# Altium PCB HEPA_CONTROL_PCB.PcbDoc (part 2 of 2)
Units mm, origin at the board's own origin, x right, y up, seen from the top; angles counter-clockwise.
Board outline 243.32 x 101.42 mm, 2 copper layers (Top Layer, Bottom Layer); 86 components, 74 nets, 296 pads, 39 vias.
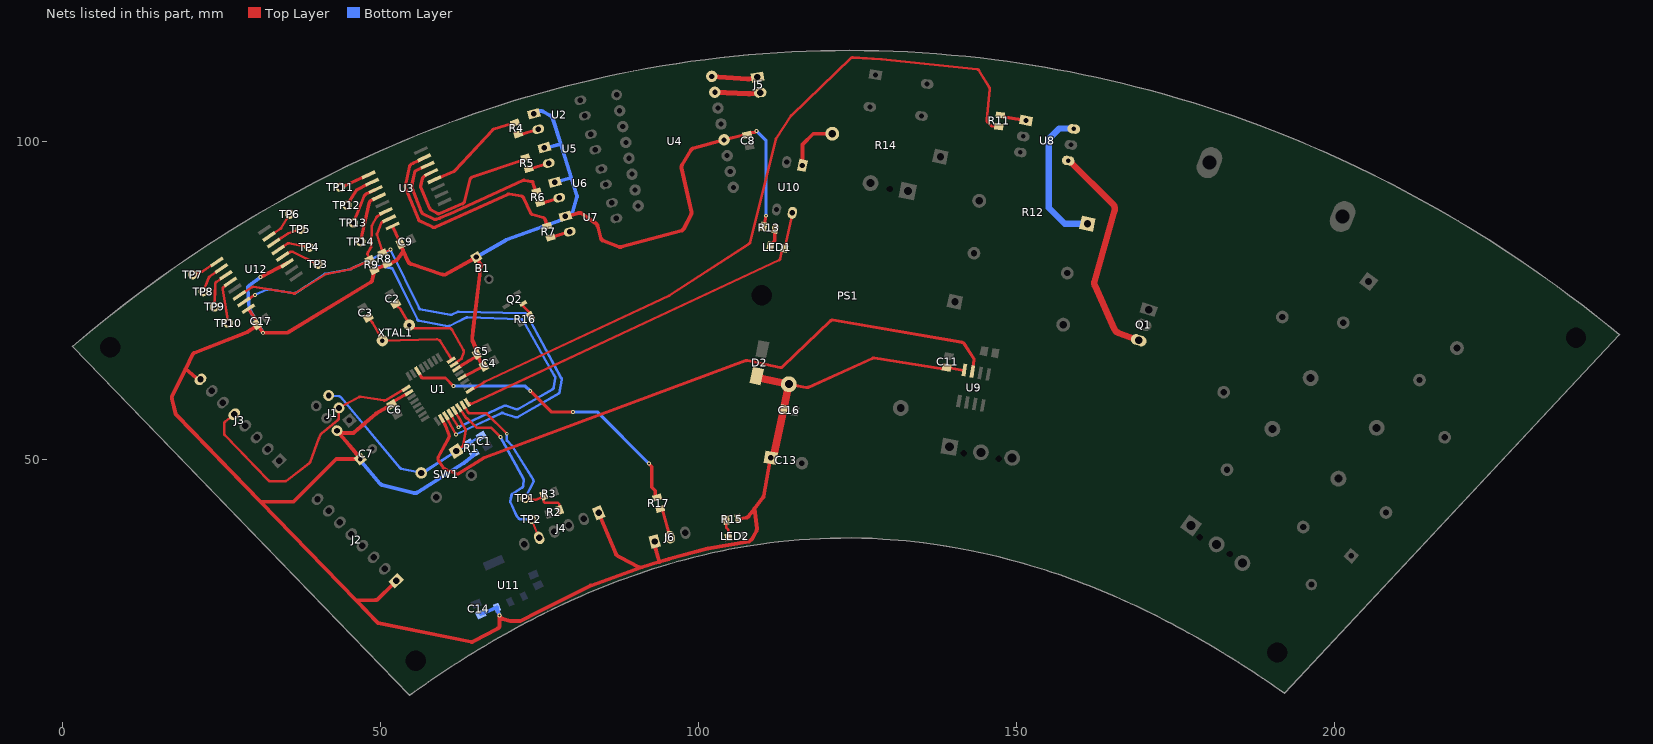
[diagram p2: the nets of this part, all layers, seen from the top]

## Via types
v1: diameter 0.6, hole 0.3, Top Layer to Bottom Layer, tented both sides, 39 vias

## Nets (pads, with @x,y where several pads share a name; then routed paths per layer and width w, separated by ;. In a path a pad name is that pad's centre, name@x,y a point inside that pad or via, vN(x,y) a via of type N, cw(c..) or ccw(c..) an arc to the next point about the centre after c; other vN are vias at no path point) (continued)
NetJ4_5: J4.5 TP2.1 U1.30 | length 31.1
  Top Layer w0.4: U1.30@62.282,58.06 62.63,57.646 63.399,56.527 ccw(c63.728,56.754) 63.658,56.36 ; 63.659,56.36 65.086,54.933 67.368,54.933 v1(68.834,53.467) ; TP2.1@73.726,40.503 74.832,37.822 J4.5@74.93,37.592
  Bottom Layer w0.4: v1(68.834,53.467) 72.503,46.838 72.408,45.788 72.408,45.786 cw(c72.009,45.824) 72.225,45.487 70.76,44.545 ccw(c70.976,44.209) 70.582,44.276 70.42,43.337 70.414,43.303 70.414,43.182 71.417,40.978 71.468,40.927 ; TP2.1@73.726,40.503 72.046,40.512 ; J4.5@74.893,37.68 J4.5@74.93,37.592 ; 71.468,40.927 71.765,40.63 ; 71.468,40.927 71.765,40.63 ; 71.468,40.927 71.765,40.63 ; 71.468,40.927 71.765,40.63 ; 71.765,40.63 ccw(c72.049,40.912) 72.045,40.512 ; 71.765,40.63 ccw(c72.049,40.912) 72.045,40.512 ; 71.765,40.63 ccw(c72.049,40.912) 72.045,40.512 ; 71.765,40.63 ccw(c72.049,40.912) 72.045,40.512
NetJ5_1: J5.1 U4.16 | length 9.4
  Top Layer w0.8: U4.16@102.074,110.176 107.698,109.738 ; J5.1@109.257,110.07 J5.1@108.68,109.885 ; 107.698,109.738 107.699,109.738 ; 107.698,109.738 107.699,109.738 ; 107.698,109.738 107.699,109.738 ; 107.699,109.738 ccw(c107.76,110.535) 107.899,109.748 ; 107.699,109.738 ccw(c107.76,110.535) 107.899,109.748 ; 107.699,109.738 ccw(c107.76,110.535) 107.899,109.748 ; 107.699,109.738 ccw(c107.76,110.535) 107.899,109.748 ; 107.899,109.748 J5.1@108.68,109.885 ; 107.899,109.748 J5.1@108.68,109.885 ; 107.899,109.748 J5.1@108.68,109.885
NetJ5_2: J5.2 U4.15 | length 7.4
  Top Layer w0.8: U4.15@102.559,107.683 107.894,107.444 ; J5.2@109.691,107.608 109.449,107.565 107.995,107.446 ; 107.894,107.444 107.896,107.444 ; 107.894,107.444 107.896,107.444 ; 107.894,107.444 107.896,107.444 ; 107.896,107.444 ccw(c107.93,108.244) 107.995,107.446 ; 107.896,107.444 ccw(c107.93,108.244) 107.995,107.446 ; 107.896,107.444 ccw(c107.93,108.244) 107.995,107.446 ; 107.896,107.444 ccw(c107.93,108.244) 107.995,107.446
NetJ6_2: J6.2 R17.2 | length 4.8
  Top Layer w0.5: R17.2@93.968,42.15 94.358,41.996 J6.2@95.504,37.719
NetLED1_1: LED1.1 R13.1 | length 2.9
  Top Layer w0.6: LED1.1@111.319,83.541 111.319,83.651 111.996,84.328 111.996,86.122 R13.1@112.04,86.166
NetLED1_2: LED1.2 U1.32 U10.4 | length 61.9
  Top Layer w0.4: U1.32@63.639,58.907 64.116,58.734 64.182,58.71 64.341,58.71 112.706,81.298 112.839,81.432 112.864,81.548 113.114,82.725 LED1.2@113.471,83.083 113.637,83.482 114.698,88.475 U10.4@114.75,88.719
NetLED2_1: LED2.1 R15.1 | length 2.8
  Top Layer w0.4: R15.1@104.357,40.383 104.357,39.207 104.702,38.862 LED2.1@104.702,37.693
NetQ1_3: Q1.3 U8.4 | length 68.1
  Top Layer w1: U8.4@158.124,96.913 158.327,96.913 165.186,90.054 ; Q1.3@169.225,68.675 168.844,68.799 166.003,69.835 ; 162.278,77.946 ccw(c163.241,77.675) 162.33,77.262 ; 162.278,77.946 ccw(c163.241,77.675) 162.33,77.262 ; 162.278,77.946 ccw(c163.241,77.675) 162.33,77.262 ; 162.278,77.946 ccw(c163.241,77.675) 162.33,77.262 ; 162.278,77.946 ccw(c163.241,77.675) 162.33,77.262 ; 162.278,77.946 ccw(c163.241,77.675) 162.33,77.262 ; 162.278,77.946 ccw(c163.241,77.675) 162.33,77.262 ; 162.278,77.946 ccw(c163.241,77.675) 162.33,77.262 ; 162.278,77.946 162.279,77.948 ; 162.278,77.946 162.279,77.948 ; 162.278,77.946 162.279,77.948 ; 162.279,77.948 165.441,89.073 ; 162.33,77.262 165.434,70.364 ; 162.33,77.262 165.434,70.364 ; 162.33,77.262 165.434,70.364 ; 165.186,90.054 cw(c164.479,89.347) 165.441,89.073 ; 165.186,90.054 cw(c164.479,89.347) 165.441,89.073 ; 165.186,90.054 cw(c164.479,89.347) 165.441,89.073 ; 165.186,90.054 cw(c164.479,89.347) 165.441,89.073 ; 165.186,90.054 cw(c164.479,89.347) 165.441,89.073 ; 165.186,90.054 cw(c164.479,89.347) 165.441,89.073 ; 165.186,90.054 cw(c164.479,89.347) 165.441,89.073 ; 165.186,90.054 cw(c164.479,89.347) 165.441,89.073 ; 165.434,70.363 ccw(c166.346,70.774) 166.003,69.835 ; 165.434,70.363 ccw(c166.346,70.774) 166.003,69.835 ; 165.434,70.363 ccw(c166.346,70.774) 166.003,69.835 ; 165.434,70.363 ccw(c166.346,70.774) 166.003,69.835 ; 165.434,70.363 ccw(c166.346,70.774) 166.003,69.835 ; 165.434,70.363 ccw(c166.346,70.774) 166.003,69.835 ; 165.434,70.363 ccw(c166.346,70.774) 166.003,69.835 ; 165.434,70.363 ccw(c166.346,70.774) 166.003,69.835
NetQ2_1: Q2.1 R16.1 | length 2.5
  Top Layer w0.4: Q2.1@72.419,74.476 72.419,74.034 73.581,72.873 R16.1@73.581,72.477
NetR2_1: R2.1 R3.2 TP1.1 U1.31 | length 31.9
  Top Layer w0.4: U1.31@62.961,58.483 63.298,58.063 63.741,57.354 ccw(c64.08,57.566) 64.11,57.167 66.658,57.167 v1(69.85,53.975) ; 74.391,43.596 75.422,43.971 R3.2@75.641,44.247 75.641,43.307 75.844,43.104 77.876,43.104 78.089,42.892 78.089,42.163 R2.1@78.16,41.965 ; TP1.1@72.71,43.805 74.195,43.576 ; TP1.1@72.71,43.805 74.195,43.576 ; TP1.1@72.71,43.805 74.195,43.576 ; 74.195,43.576 ccw(c74.254,43.972) 74.39,43.596 ; 74.195,43.576 ccw(c74.254,43.972) 74.39,43.596 ; 74.195,43.576 ccw(c74.254,43.972) 74.39,43.596 ; 74.195,43.576 ccw(c74.254,43.972) 74.39,43.596
  Bottom Layer w0.4: v1(69.85,53.975) 69.85,52.904 70.668,52.086 74.022,46.702 74.059,46.517 TP1.1@72.71,43.805
NetR4_1: R4.1 U2.2 | length 3.3
  Top Layer w0.5: R4.1@71.647,101.087 72.136,101.061 74.552,101.8 U2.2@74.793,101.869
NetR5_1: R5.1 U5.2 | length 3.3
  Top Layer w0.5: R5.1@73.298,95.626 73.752,95.717 76.203,96.466 U5.2@76.444,96.535
NetR6_1: R6.1 U6.2 | length 3.1
  Top Layer w0.5: R6.1@75.076,90.292 75.554,90.302 77.854,91.005 U6.2@78.095,91.074
NetR7_1: R7.1 U7.2 | length 3.2
  Top Layer w0.5: R7.1@76.727,84.831 77.17,84.957 79.505,85.671 U7.2@79.746,85.74
NetR11_1: R11.1 U1.1 | length 119.5
  Top Layer w0.4: U1.1@64.075,60.795 64.564,61.023 66.269,62.088 ; 66.311,62.111 95.351,75.68 ccw(c95.182,76.043) 95.4,75.707 107.945,83.861 ccw(c107.727,84.196) 108.115,84.1 112.125,100.264 cw(c112.513,100.168) 112.178,100.387 114.529,103.975 cw(c114.864,103.756) 114.587,104.044 123.954,113.037 cw(c124.231,112.748) 124.251,113.148 ; 124.252,113.148 128.767,112.904 ; R11.1@147.193,102.235 146.683,102.273 146.183,102.343 ; 66.269,62.088 cw(c66.481,61.749) 66.31,62.111 ; 66.269,62.088 cw(c66.481,61.749) 66.31,62.111 ; 66.269,62.088 cw(c66.481,61.749) 66.31,62.111 ; 66.269,62.088 cw(c66.481,61.749) 66.31,62.111 ; 128.767,112.904 cw(c128.746,112.504) 128.788,112.902 ; 128.767,112.904 cw(c128.746,112.504) 128.788,112.902 ; 128.767,112.904 cw(c128.746,112.504) 128.788,112.902 ; 128.767,112.904 cw(c128.746,112.504) 128.788,112.902 ; 128.789,112.902 143.822,111.273 ; 143.822,111.273 cw(c143.779,110.876) 144.12,111.085 ; 143.822,111.273 cw(c143.779,110.876) 144.12,111.085 ; 143.822,111.273 cw(c143.779,110.876) 144.12,111.085 ; 143.822,111.273 cw(c143.779,110.876) 144.12,111.085 ; 144.12,111.085 144.121,111.084 ; 144.12,111.085 144.121,111.084 ; 144.12,111.085 144.121,111.084 ; 144.121,111.084 145.727,108.445 cw(c145.385,108.237) 145.783,108.198 145.307,103.311 ccw(c145.705,103.273) 145.421,102.991 ; 145.422,102.99 145.954,102.458 ; 145.421,102.991 145.954,102.458 ; 145.421,102.991 145.954,102.458 ; 145.421,102.991 145.954,102.458 ; 145.954,102.458 ccw(c146.238,102.739) 146.182,102.343 ; 145.954,102.458 ccw(c146.238,102.739) 146.182,102.343 ; 145.954,102.458 ccw(c146.238,102.739) 146.182,102.343 ; 145.954,102.458 ccw(c146.238,102.739) 146.182,102.343
NetR11_2: R11.2 U8.1 | length 4.2
  Top Layer w0.6: R11.2@147.453,104.087 147.831,103.832 150.815,103.374 U8.1@151.502,103.239
NetR12_1: R12.1 U8.6 | length 22.6
  Bottom Layer w1: U8.6@159.006,101.916 158.941,101.981 156.718,101.981 155.067,100.33 155.067,89.535 157.607,86.995 R12.1@161.163,86.995
NetR14_2: R14.2 U10.1 | length 8.7
  Top Layer w0.6: U10.1@116.334,96.173 116.334,99.443 118.045,101.154 R14.2@121.028,101.154
NetR17_1: R17.1 U1.14 | length 48.4
  Top Layer w0.5: U1.14@55.828,63.86 56.075,63.443 56.515,62.738 60.198,62.738 v1(61.468,61.468) ; v1(73.533,60.706) 76.835,57.404 v1(80.264,57.404) ; v1(92.202,49.276) 92.202,49.249 92.642,48.809 92.642,45.534 93.176,45 93.176,44.264 R17.1@93.484,43.956
  Bottom Layer w0.5: v1(61.468,61.468) 72.771,61.468 v1(73.533,60.706) ; v1(80.264,57.404) 84.074,57.404 v1(92.202,49.276)
NetTP3_1: TP3.1 U12.4 | length 8.3
  Top Layer w0.4: U12.4@34.58,81.844 U12.4@35.401,82.313 ; TP3.1@40.132,80.645 36.148,82.577 ; U12.4@35.401,82.313 35.75,82.548 ; U12.4@35.401,82.313 35.75,82.548 ; U12.4@35.401,82.313 35.75,82.548 ; 35.75,82.548 cw(c35.974,82.217) 36.148,82.577 ; 35.75,82.548 cw(c35.974,82.217) 36.148,82.577 ; 35.75,82.548 cw(c35.974,82.217) 36.148,82.577 ; 35.75,82.548 cw(c35.974,82.217) 36.148,82.577
NetTP4_1: TP4.1 U12.5 | length 5.2
  Top Layer w0.4: U12.5@33.869,82.897 34.653,83.421 35.296,83.855 cw(c35.52,83.523) 35.595,83.916 TP4.1@38.735,83.312
NetTP5_1: TP5.1 U12.6 | length 4.7
  Top Layer w0.4: U12.6@33.159,83.949 33.947,84.468 35.388,85.44 cw(c35.611,85.109) 35.485,85.488 TP5.1@37.338,86.106
NetTP6_1: TP6.1 U12.7 | length 13.2
  Top Layer w0.4: U12.7@32.449,85.002 33.236,85.522 34.218,86.184 ; 34.218,86.184 ccw(c33.994,86.516) 34.336,86.308 ; 34.218,86.184 ccw(c33.994,86.516) 34.336,86.308 ; 34.218,86.184 ccw(c33.994,86.516) 34.336,86.308 ; 34.218,86.184 ccw(c33.994,86.516) 34.336,86.308 ; 34.336,86.308 TP6.1@35.687,88.519 ; 34.336,86.308 TP6.1@35.687,88.519 ; 34.336,86.308 TP6.1@35.687,88.519 ; 34.336,86.308 TP6.1@35.687,88.519
NetTP7_1: TP7.1 U12.9 | length 4.3
  Top Layer w0.4: TP7.1@20.447,78.994 21.918,79.484 ccw(c21.793,79.864) 22.016,79.533 23.444,80.496 U12.9@24.242,80.999
NetTP8_1: TP8.1 U12.10 | length 4.8
  Top Layer w0.4: TP8.1@22.098,76.327 22.942,78.497 cw(c23.314,78.351) 23.091,78.683 24.174,79.414 U12.10@24.953,79.946
NetTP9_1: TP9.1 U12.11 | length 6.9
  Top Layer w0.4: TP9.1@23.876,73.914 23.996,77.52 ; 24.172,77.838 24.904,78.332 U12.11@25.663,78.893 ; 23.996,77.52 cw(c24.396,77.507) 24.171,77.838 ; 23.996,77.52 cw(c24.396,77.507) 24.171,77.838 ; 23.996,77.52 cw(c24.396,77.507) 24.171,77.838 ; 23.996,77.52 cw(c24.396,77.507) 24.171,77.838
NetTP10_1: TP10.1 U12.12 | length 7.1
  Top Layer w0.4: TP10.1@26.035,71.374 25.186,76.709 cw(c25.581,76.773) 25.357,77.105 25.615,77.278 U12.12@26.373,77.84
NetTP11_1: TP11.1 U3.9 | length 9
  Top Layer w0.5: TP11.1@43.688,92.71 45.458,93.469 ; U3.9@48.126,94.701 U3.9@47.312,94.333 ; 45.458,93.469 ccw(c45.262,93.928) 45.473,93.475 ; 45.458,93.469 ccw(c45.262,93.928) 45.473,93.475 ; 45.458,93.469 ccw(c45.262,93.928) 45.473,93.475 ; 45.458,93.469 ccw(c45.262,93.928) 45.473,93.475 ; 45.473,93.475 U3.9@47.312,94.333 ; 45.473,93.475 U3.9@47.312,94.333 ; 45.473,93.475 U3.9@47.312,94.333
NetTP12_1: TP12.1 U3.10 | length 5.6
  Top Layer w0.5: TP12.1@44.704,89.916 46.153,92.21 cw(c46.576,91.944) 46.353,92.391 47.866,93.146 U3.10@48.663,93.55
NetTP13_1: TP13.1 U3.11 | length 9.4
  Top Layer w0.5: TP13.1@45.72,87.122 47.425,91.384 ; U3.11@49.199,92.399 U3.11@48.402,91.995 ; 47.425,91.384 cw(c47.889,91.199) 47.676,91.651 ; 47.425,91.384 cw(c47.889,91.199) 47.676,91.651 ; 47.425,91.384 cw(c47.889,91.199) 47.676,91.651 ; 47.425,91.384 cw(c47.889,91.199) 47.676,91.651 ; 47.675,91.651 U3.11@48.402,91.995 ; 47.675,91.651 U3.11@48.402,91.995 ; 47.675,91.651 U3.11@48.402,91.995
NetTP14_1: TP14.1 U3.12 | length 22
  Top Layer w0.5: U3.12@49.736,91.248 48.93,90.863 48.484,90.655 ; TP14.1@46.863,84.201 48.207,90.31 ; TP14.1@46.863,84.201 48.207,90.31 ; TP14.1@46.863,84.201 48.207,90.31 ; 48.207,90.31 cw(c48.695,90.202) 48.484,90.655 ; 48.207,90.31 cw(c48.695,90.202) 48.484,90.655 ; 48.207,90.31 cw(c48.695,90.202) 48.484,90.655 ; 48.207,90.31 cw(c48.695,90.202) 48.484,90.655
NetU1_26: U1.26 U9.7 | length 115.1
  Top Layer w0.5: 59.07,50.302 60.725,53.392 ccw(c60.284,53.628) 60.751,53.808 60.211,55.211 ; 59.094,49.789 59.861,48.639 ; U1.26@59.569,56.364 59.805,55.939 60.179,55.278 cw(c59.744,55.032) 60.211,55.212 ; 60.081,48.455 61.858,47.694 61.953,47.653 62.199,47.653 66.328,50.234 66.376,50.252 107.439,65.456 107.523,65.487 107.664,65.487 112.838,64.415 113.089,64.415 113.234,64.554 120.721,71.707 ; 121.152,71.839 141.407,68.358 ; U9.7@143.06,63.762 143.14,64.494 143.253,65.134 ; 59.07,50.301 ccw(c59.511,50.065) 59.094,49.79 ; 59.07,50.301 ccw(c59.511,50.065) 59.094,49.79 ; 59.07,50.301 ccw(c59.511,50.065) 59.094,49.79 ; 59.07,50.301 ccw(c59.511,50.065) 59.094,49.79 ; 59.861,48.639 ccw(c60.278,48.915) 60.08,48.456 ; 59.861,48.639 ccw(c60.278,48.915) 60.08,48.456 ; 59.861,48.639 ccw(c60.278,48.915) 60.08,48.456 ; 59.861,48.639 ccw(c60.278,48.915) 60.08,48.456 ; 120.721,71.707 cw(c121.067,71.347) 121.151,71.839 ; 120.721,71.707 cw(c121.067,71.347) 121.151,71.839 ; 120.721,71.707 cw(c121.067,71.347) 121.151,71.839 ; 120.721,71.707 cw(c121.067,71.347) 121.151,71.839 ; 141.407,68.358 cw(c141.322,67.865) 141.739,68.142 ; 141.407,68.358 cw(c141.322,67.865) 141.739,68.142 ; 141.407,68.358 cw(c141.322,67.865) 141.739,68.142 ; 141.407,68.358 cw(c141.322,67.865) 141.739,68.142 ; 141.739,68.141 143.261,65.843 ; 141.739,68.141 143.261,65.843 ; 141.739,68.141 143.261,65.843 ; 143.253,65.135 cw(c143.745,65.047) 143.261,65.169 ; 143.253,65.135 cw(c143.745,65.047) 143.261,65.169 ; 143.253,65.135 cw(c143.745,65.047) 143.261,65.169 ; 143.253,65.135 cw(c143.745,65.047) 143.261,65.169 ; 143.261,65.169 143.33,65.445 ; 143.261,65.169 143.33,65.445 ; 143.261,65.169 143.33,65.445 ; 143.261,65.843 cw(c142.844,65.567) 143.33,65.445 ; 143.261,65.843 cw(c142.844,65.567) 143.33,65.445 ; 143.261,65.843 cw(c142.844,65.567) 143.33,65.445 ; 143.261,65.843 cw(c142.844,65.567) 143.33,65.445
P0: R4.2 U3.4 | length 15.9
  Top Layer w0.5: U3.4@58.468,93.918 59.29,94.269 61.496,95.208 ccw(c61.3,95.668) 61.668,95.329 67.599,101.755 cw(c67.967,101.415) 67.819,101.893 ; 67.82,101.894 70.655,102.76 R4.2@71.101,102.875
P1: R5.2 U3.5 | length 51.3
  Top Layer w0.5: 56.327,92.682 57.722,89.428 ; U3.5@57.931,95.069 U3.5@57.134,94.665 ; R5.2@72.752,97.414 72.385,97.041 64.393,94.322 ; 56.303,93.003 ccw(c56.787,92.879) 56.327,92.683 ; 56.303,93.003 ccw(c56.787,92.879) 56.327,92.683 ; 56.303,93.003 ccw(c56.787,92.879) 56.327,92.683 ; 56.303,93.003 ccw(c56.787,92.879) 56.327,92.683 ; 56.303,93.003 56.589,94.149 ; 56.589,94.149 cw(c57.074,94.028) 56.8,94.446 ; 56.589,94.149 cw(c57.074,94.028) 56.8,94.446 ; 56.589,94.149 cw(c57.074,94.028) 56.8,94.446 ; 56.589,94.149 cw(c57.074,94.028) 56.8,94.446 ; 56.8,94.446 U3.5@57.134,94.665 ; 56.8,94.446 U3.5@57.134,94.665 ; 56.8,94.446 U3.5@57.134,94.665 ; 57.722,89.428 ccw(c58.181,89.627) 57.922,89.199 ; 57.722,89.428 ccw(c58.181,89.627) 57.922,89.199 ; 57.722,89.428 ccw(c58.181,89.627) 57.922,89.199 ; 57.722,89.428 ccw(c58.181,89.627) 57.922,89.199 ; 57.922,89.199 57.924,89.198 ; 57.922,89.199 57.924,89.198 ; 57.922,89.199 57.924,89.198 ; 57.924,89.198 58.842,88.647 ; 57.924,89.198 58.842,88.647 ; 57.924,89.198 58.842,88.647 ; 58.842,88.647 ccw(c59.098,89.076) 59.285,88.612 ; 58.842,88.647 ccw(c59.098,89.076) 59.285,88.612 ; 58.842,88.647 ccw(c59.098,89.076) 59.285,88.612 ; 58.842,88.647 ccw(c59.098,89.076) 59.285,88.612 ; 59.286,88.613 ccw(c59.098,89.076) 59.294,88.616 ; 59.286,88.613 ccw(c59.098,89.076) 59.294,88.616 ; 59.286,88.613 ccw(c59.098,89.076) 59.294,88.616 ; 59.286,88.613 ccw(c59.098,89.076) 59.294,88.616 ; 59.294,88.616 62.912,90.158 ; 59.294,88.616 62.912,90.158 ; 59.294,88.616 62.912,90.158 ; 62.912,90.158 ccw(c62.716,90.618) 63.2,90.495 ; 62.912,90.158 ccw(c62.716,90.618) 63.2,90.495 ; 62.912,90.158 ccw(c62.716,90.618) 63.2,90.495 ; 62.912,90.158 ccw(c62.716,90.618) 63.2,90.495 ; 63.2,90.495 63.2,90.496 ; 63.2,90.495 63.2,90.496 ; 63.2,90.495 63.2,90.496 ; 63.2,90.496 64.069,93.969 ; 63.2,90.496 64.069,93.969 ; 63.2,90.496 64.069,93.969 ; 64.069,93.969 cw(c64.554,93.848) 64.392,94.321 ; 64.069,93.969 cw(c64.554,93.848) 64.392,94.321 ; 64.069,93.969 cw(c64.554,93.848) 64.392,94.321 ; 64.069,93.969 cw(c64.554,93.848) 64.392,94.321 ; 64.392,94.321 64.393,94.322 ; 64.392,94.321 64.393,94.322 ; 64.392,94.321 64.393,94.322
P2: R6.2 U3.6 | length 74.3
  Top Layer w0.5: 54.919,92.697 56.446,88.824 ; U3.6@57.395,96.22 U3.6@56.594,95.823 ; 72.671,93.825 ccw(c72.582,93.333) 72.374,93.788 ; 72.671,93.825 73.914,93.599 74.318,92.277 R6.2@74.53,92.08 ; 54.895,92.984 ccw(c55.384,92.881) 54.919,92.698 ; 54.895,92.984 ccw(c55.384,92.881) 54.919,92.698 ; 54.895,92.984 ccw(c55.384,92.881) 54.919,92.698 ; 54.895,92.984 ccw(c55.384,92.881) 54.919,92.698 ; 54.895,92.984 55.321,95.009 ; 54.895,92.984 55.321,95.009 ; 54.895,92.984 55.321,95.009 ; 55.321,95.009 cw(c55.811,94.906) 55.599,95.359 ; 55.321,95.009 cw(c55.811,94.906) 55.599,95.359 ; 55.321,95.009 cw(c55.811,94.906) 55.599,95.359 ; 55.321,95.009 cw(c55.811,94.906) 55.599,95.359 ; 55.599,95.359 U3.6@56.594,95.823 ; 55.599,95.359 U3.6@56.594,95.823 ; 55.599,95.359 U3.6@56.594,95.823 ; 56.446,88.824 ccw(c56.911,89.007) 56.686,88.561 ; 56.446,88.824 ccw(c56.911,89.007) 56.686,88.561 ; 56.446,88.824 ccw(c56.911,89.007) 56.686,88.561 ; 56.446,88.824 ccw(c56.911,89.007) 56.686,88.561 ; 56.686,88.56 58.361,87.723 ; 56.686,88.56 58.361,87.723 ; 56.686,88.56 58.361,87.723 ; 58.361,87.723 ccw(c58.585,88.17) 58.743,87.695 ; 58.361,87.723 ccw(c58.585,88.17) 58.743,87.695 ; 58.361,87.723 ccw(c58.585,88.17) 58.743,87.695 ; 58.361,87.723 ccw(c58.585,88.17) 58.743,87.695 ; 58.743,87.695 59.291,87.878 ; 58.743,87.695 59.291,87.878 ; 58.743,87.695 59.291,87.878 ; 59.291,87.878 ccw(c59.134,88.353) 59.326,87.891 ; 59.291,87.878 ccw(c59.134,88.353) 59.326,87.891 ; 59.291,87.878 ccw(c59.134,88.353) 59.326,87.891 ; 59.291,87.878 ccw(c59.134,88.353) 59.326,87.891 ; 59.326,87.891 60.825,88.516 ; 59.326,87.891 60.825,88.516 ; 59.326,87.891 60.825,88.516 ; 60.825,88.516 ccw(c60.633,88.977) 60.841,88.522 ; 60.825,88.516 ccw(c60.633,88.977) 60.841,88.522 ; 60.825,88.516 ccw(c60.633,88.977) 60.841,88.522 ; 60.825,88.516 ccw(c60.633,88.977) 60.841,88.522 ; 60.841,88.522 72.374,93.788 ; 60.841,88.522 72.374,93.788 ; 60.841,88.522 72.374,93.788
P3: R7.2 U3.7 | length 42.3
  Top Layer w0.5: 55.934,87.684 53.906,92.694 cw(c54.37,92.88) 53.881,92.988 53.882,92.989 54.559,96.034 ; 55.934,87.683 ccw(c56.397,87.872) 56.183,87.42 58.21,86.46 ; U3.7@56.858,97.371 56.061,96.967 55.123,96.522 ; 75.555,87.962 73.881,88.454 cw(c74.021,88.934) 73.566,88.726 73.565,88.727 72.5,91.07 ; R7.2@76.181,86.619 76.126,86.864 75.892,87.628 ; 54.559,96.034 cw(c55.047,95.926) 54.823,96.372 ; 54.559,96.034 cw(c55.047,95.926) 54.823,96.372 ; 54.559,96.034 cw(c55.047,95.926) 54.823,96.372 ; 54.559,96.034 cw(c55.047,95.926) 54.823,96.372 ; 54.823,96.372 55.113,96.517 ; 54.823,96.372 55.113,96.517 ; 54.823,96.372 55.113,96.517 ; 55.113,96.517 cw(c55.337,96.07) 55.123,96.522 ; 55.113,96.517 cw(c55.337,96.07) 55.123,96.522 ; 55.113,96.517 cw(c55.337,96.07) 55.123,96.522 ; 55.113,96.517 cw(c55.337,96.07) 55.123,96.522 ; 58.211,86.459 ccw(c58.424,86.911) 58.632,86.457 ; 58.211,86.459 ccw(c58.424,86.911) 58.632,86.457 ; 58.211,86.459 ccw(c58.424,86.911) 58.632,86.457 ; 58.211,86.459 ccw(c58.424,86.911) 58.632,86.457 ; 58.632,86.457 69.965,91.63 cw(c70.173,91.176) 70.255,91.669 72.127,91.357 ; 72.127,91.357 72.129,91.357 ; 72.127,91.357 72.129,91.357 ; 72.127,91.357 72.129,91.357 ; 72.129,91.357 cw(c72.045,90.864) 72.5,91.07 ; 72.129,91.357 cw(c72.045,90.864) 72.5,91.07 ; 72.129,91.357 cw(c72.045,90.864) 72.5,91.07 ; 72.129,91.357 cw(c72.045,90.864) 72.5,91.07 ; 75.556,87.961 cw(c75.414,87.482) 75.892,87.628 ; 75.556,87.961 cw(c75.414,87.482) 75.892,87.628 ; 75.556,87.961 cw(c75.414,87.482) 75.892,87.628 ; 75.556,87.961 cw(c75.414,87.482) 75.892,87.628
RST: C1.2 J1.5 R1.1 SW1.1 U1.29 | length 47.1
  Top Layer w0.4: U1.29@61.604,57.636 61.868,57.17 62.353,56.394 ; SW1.1@61.889,51.255 SW1.1@62.434,51.704 ; 62.354,56.393 cw(c62.014,56.182) 62.361,56.382 62.935,55.38 ; 62.936,55.379 63.305,54.73 ; 63.017,52.234 63.352,54.473 ; SW1.1@62.434,51.704 62.833,51.954 ; SW1.1@62.434,51.704 62.833,51.954 ; SW1.1@62.434,51.704 62.833,51.954 ; 62.833,51.954 ccw(c62.621,52.293) 63.016,52.233 ; 62.833,51.954 ccw(c62.621,52.293) 63.016,52.233 ; 62.833,51.954 ccw(c62.621,52.293) 63.016,52.233 ; 62.833,51.954 ccw(c62.621,52.293) 63.016,52.233 ; 63.305,54.729 cw(c62.957,54.533) 63.352,54.473 ; 63.305,54.729 cw(c62.957,54.533) 63.352,54.473 ; 63.305,54.729 cw(c62.957,54.533) 63.352,54.473 ; 63.305,54.729 cw(c62.957,54.533) 63.352,54.473
  Bottom Layer w0.4: J1.5@41.82,59.985 43.487,59.839 43.633,59.826 43.748,59.711 53.075,48.595 53.087,48.581 53.099,48.569 53.186,48.482 56.387,47.863 56.386,47.861 56.396,47.861 56.637,47.815 56.797,47.815 57.96,48.6 SW1.1@61.309,50.864 ; SW1.1@56.377,47.811 61.295,50.884 SW1.1@61.644,51.103 ; SW1.1@61.65,51.094 SW1.1@61.889,51.255 62.484,51.624 63.404,52.155 R1.1@63.794,52.499 64.26,52.713 65.382,53.361 C1.2@65.844,53.611
SCK: J1.3 J3.5 U1.17 | length 44.9
  Top Layer w0.4: J3.5@26.965,57.043 26.785,56.87 25.549,55.873 ccw(c25.8,55.562) 25.4,55.562 25.4,54.01 ccw(c25.8,54.01) 25.512,53.732 32.394,46.604 ; 32.395,46.604 ccw(c32.682,46.882) 32.682,46.482 34.916,46.482 ccw(c34.916,46.882) 35.16,46.565 38.771,49.333 ccw(c38.528,49.651) 38.902,49.51 40.298,53.243 cw(c40.673,53.103) 40.308,53.268 40.51,53.714 cw(c40.874,53.549) 40.517,53.729 40.602,53.898 cw(c40.959,53.719) 40.706,54.028 43.289,56.143 ccw(c43.036,56.452) 43.436,56.448 J1.3@43.452,58.039 46.616,59.752 ; 46.87,59.795 50.53,59.205 ; U1.17@54.035,61.125 53.541,60.905 50.798,59.257 ; 46.616,59.752 cw(c46.807,59.4) 46.87,59.795 ; 46.616,59.752 cw(c46.807,59.4) 46.87,59.795 ; 46.616,59.752 cw(c46.807,59.4) 46.87,59.795 ; 46.616,59.752 cw(c46.807,59.4) 46.87,59.795 ; 50.53,59.205 ccw(c50.592,59.6) 50.798,59.257 ; 50.53,59.205 ccw(c50.592,59.6) 50.798,59.257 ; 50.53,59.205 ccw(c50.592,59.6) 50.798,59.257 ; 50.53,59.205 ccw(c50.592,59.6) 50.798,59.257
SCL: R9.1 U1.28 U3.14 U12.14 | length 96.8
  Top Layer w0.4: U12.14@27.793,75.734 28.588,76.242 29.739,77.019 29.749,77.025 ; 45.381,79.902 47.832,81.046 R9.1@48.246,81.365 ; v1(48.514,80.518) 48.268,81.045 R9.1@48.246,81.365 ; U3.14@49.968,88.52 U3.14@50.809,88.946 49.988,88.475 49.5,88.194 ccw(c49.7,87.847) 49.349,88.039 48.654,86.764 ; U1.28@60.926,57.212 61.149,56.721 v1(62.23,54.991) ; 29.749,77.025 cw(c29.972,76.694) 29.899,77.087 ; 29.749,77.025 cw(c29.972,76.694) 29.899,77.087 ; 29.749,77.025 cw(c29.972,76.694) 29.899,77.087 ; 29.749,77.025 cw(c29.972,76.694) 29.899,77.087 ; 29.899,77.087 29.995,77.087 36.283,76.039 36.316,76.034 36.349,76.034 36.463,76.034 41.292,79.031 41.361,79.046 45.295,79.874 ; 45.295,79.874 ccw(c45.212,80.265) 45.38,79.902 ; 45.295,79.874 ccw(c45.212,80.265) 45.38,79.902 ; 45.295,79.874 ccw(c45.212,80.265) 45.38,79.902 ; 45.295,79.874 ccw(c45.212,80.265) 45.38,79.902 ; 47.97,82.1 cw(c48.333,82.268) 47.994,82.479 ; 47.97,82.1 cw(c48.333,82.268) 47.994,82.479 ; 47.97,82.1 cw(c48.333,82.268) 47.994,82.479 ; 47.97,82.1 cw(c48.333,82.268) 47.994,82.479 ; 47.97,82.1 47.971,82.099 48.174,81.663 R9.1@48.246,81.365 ; 47.994,82.479 48.456,83.22 ; 48.456,83.22 ccw(c48.117,83.432) 48.517,83.421 ; 48.456,83.22 ccw(c48.117,83.432) 48.517,83.421 ; 48.456,83.22 ccw(c48.117,83.432) 48.517,83.421 ; 48.456,83.22 ccw(c48.117,83.432) 48.517,83.421 ; 48.517,83.421 48.605,86.584 ; 48.605,86.584 cw(c49.005,86.572) 48.654,86.764 ; 48.605,86.584 cw(c49.005,86.572) 48.654,86.764 ; 48.605,86.584 cw(c49.005,86.572) 48.654,86.764 ; 48.605,86.584 cw(c49.005,86.572) 48.654,86.764
  Bottom Layer w0.4: v1(48.514,80.518) 51.61,80.042 ; 51.611,80.042 cw(c51.549,79.646) 51.908,79.823 55.791,71.935 55.792,71.934 ccw(c56.15,72.112) 56.077,71.719 60.574,70.89 ; 60.575,70.89 ccw(c60.647,71.284) 60.826,70.926 63.41,72.218 cw(c63.588,71.86) 63.6,72.26 72.038,72.016 72.04,72.015 cw(c72.027,71.616) 72.374,71.814 76.962,63.754 77.402,62.984 ; v1(62.23,54.991) 69.452,58.353 ; 69.452,58.353 cw(c69.621,57.99) 69.746,58.37 69.747,58.37 69.978,58.293 71.331,57.842 ccw(c71.457,58.221) 71.657,57.875 77.047,60.989 ccw(c76.847,61.336) 77.243,61.28 77.45,62.73 ccw(c77.054,62.786) 77.403,62.983
SDA: R8.1 U1.27 U3.15 U12.15 | length 98.4
  Top Layer w0.4: U12.15@28.503,74.681 29.297,75.192 v1(30.226,75.819) ; U3.15@50.496,87.386 U3.15@51.346,87.795 50.49,87.4 50.309,87.316 ccw(c50.478,86.953) 50.106,87.102 49.456,85.477 49.428,85.406 49.428,85.329 49.428,85.267 50.235,82.693 R8.1@50.278,82.381 50.759,82.557 v1(51.562,82.931) ; U1.27@60.247,56.788 60.467,56.294 v1(61.849,53.848)
  Bottom Layer w0.4: v1(30.226,75.819) 32.153,76.662 ; 32.371,76.691 36.426,76.095 ; 41.352,79.135 ccw(c41.426,78.742) 41.209,79.078 36.703,76.155 ; 41.353,79.136 45.286,79.873 ccw(c45.212,80.266) 45.388,79.907 v1(51.562,82.931) 56.029,73.773 56.059,73.713 56.106,73.666 56.193,73.579 60.936,72.661 61.065,72.661 61.147,72.7 62.162,73.186 62.258,73.186 62.263,73.185 72.667,72.904 ; v1(61.849,53.848) 68.943,57.208 cw(c69.114,56.847) 69.239,57.227 69.24,57.226 71.207,56.571 ccw(c71.332,56.951) 71.528,56.602 ; 71.529,56.603 78.105,60.325 78.463,62.475 ccw(c78.069,62.541) 78.421,62.731 ; 72.668,72.904 cw(c72.657,72.504) 73.008,72.695 78.42,62.732 ; 32.153,76.662 cw(c32.313,76.296) 32.37,76.691 ; 32.153,76.662 cw(c32.313,76.296) 32.37,76.691 ; 32.153,76.662 cw(c32.313,76.296) 32.37,76.691 ; 32.153,76.662 cw(c32.313,76.296) 32.37,76.691 ; 36.426,76.095 ccw(c36.485,76.491) 36.703,76.155 ; 36.426,76.095 ccw(c36.485,76.491) 36.703,76.155 ; 36.426,76.095 ccw(c36.485,76.491) 36.703,76.155 ; 36.426,76.095 ccw(c36.485,76.491) 36.703,76.155
VCC: B1.P C4.2 C5.2 C6.2 C7.1 C8.2 C9.2 C11.2 C13.1 C14.2 C16.2 C17.2 D2.2 J1.2 J2.1 J3.8 J4.1 J6.1 PS1.4 R1.2 R8.2 R9.2 R13.2 R15.2 U1.4 U1.6 U1.18 U2.1 U3.16 U4.12 U5.1 U6.1 U7.1 U9.8 U11.3 U12.3 U12.16 | length 495.8
  Top Layer w0.5: U12.16@29.214,73.629 29.22,73.597 30.5,71.7 C17.2@30.496,71.125 ; C6.2@51.747,58.564 52.017,59.046 54.034,60.21 U1.18@54.459,60.446 ; U3.16@51.883,86.644 51.895,86.617 52.991,84.266 C9.2@53.159,83.821 ; U1.6@61.955,64.187 62.354,64.466 63.956,65.499 ; U1.4@62.803,62.831 63.228,63.066 C4.2@66.139,64.569 ; C5.2@65.112,66.446 65.09,66.159 63.975,65.51 ; U4.12@104.013,100.203 107.109,100.975 C8.2@107.605,100.949 ; C8.2@107.636,100.956 108.006,101.327 108.793,101.327 109.066,101.6 v1(109.093,101.6) ; R13.2@110.21,86.554 110.347,86.996 v1(110.617,88.265) ; PS1.4@114.196,61.765 116.937,61.244 ; 117.238,61.279 127.371,65.851 ; U9.8@141.81,63.982 141.749,63.927 139.506,64.322 C11.2@139.036,64.392 138.512,64.154 127.656,65.889 127.655,65.89 ; 63.956,65.499 cw(c64.227,65.078) 63.975,65.51 ; 63.956,65.499 cw(c64.227,65.078) 63.975,65.51 ; 63.956,65.499 cw(c64.227,65.078) 63.975,65.51 ; 63.956,65.499 cw(c64.227,65.078) 63.975,65.51 ; 116.937,61.244 ccw(c117.032,61.735) 117.237,61.278 ; 116.937,61.244 ccw(c117.032,61.735) 117.237,61.278 ; 116.937,61.244 ccw(c117.032,61.735) 117.237,61.278 ; 116.937,61.244 ccw(c117.032,61.735) 117.237,61.278 ; 127.371,65.851 cw(c127.577,65.396) 127.655,65.89 ; 127.371,65.851 cw(c127.577,65.396) 127.655,65.89 ; 127.371,65.851 cw(c127.577,65.396) 127.655,65.89 ; 127.371,65.851 cw(c127.577,65.396) 127.655,65.89
  Top Layer w0.6: 17.893,56.906 31.096,43.288 ; 17.893,56.907 cw(c18.324,57.324) 17.742,57.18 17.165,59.539 17.148,59.609 17.148,59.681 17.148,59.823 19.329,64.186 ; J3.8@21.671,62.525 21.492,62.351 19.329,64.186 ; v1(31.115,78.613) U12.3@35.29,80.791 ; J1.2@43.139,54.461 43.511,54.092 45.72,54.102 47.549,55.626 47.555,55.632 49.231,57.11 ; J1.2@43.474,54.061 44.545,52.785 46.558,50.386 C7.1@46.794,49.996 43.011,49.996 36.303,43.288 31.096,43.288 ; C6.2@51.747,58.564 51.374,58.361 49.328,57.18 ; J2.1@52.424,30.89 52,30.321 49.572,27.977 cw(c49.156,28.408) 49.169,27.808 46.162,27.749 ; C9.2@53.159,83.821 53.258,83.398 53.511,82.856 ; 64.399,68.95 ccw(c64.997,68.896) 64.445,68.661 65.159,66.985 65.115,66.481 C5.2@65.112,66.446 ; 64.4,68.95 64.515,70.221 ; 64.517,70.241 65.761,80.319 ; C5.2@65.134,66.479 65.285,66.076 65.971,64.888 C4.2@66.139,64.569 ; 65.686,80.692 65.294,81.369 B1.P@65.04,81.742 64.648,81.521 60.126,78.976 59.871,78.976 59.779,79.007 54.729,80.69 cw(c54.918,81.26) 54.374,81.005 53.511,82.856 ; v1(68.707,25.4) 68.707,23.856 cw(c68.107,23.856) 68.387,23.325 64.579,21.309 ; 69.224,24.823 70.409,24.511 71.882,24.511 74.994,26.067 82.995,30.068 83.027,30.084 91.039,32.964 90.589,33.005 89.597,33.518 87.315,34.698 ; U7.1@79.046,88.182 79.693,88.282 81.129,88.693 81.13,88.694 cw(c81.294,88.116) 81.643,88.605 83.898,86.994 83.899,86.993 cw(c83.549,86.506) 84.129,86.658 84.631,84.75 84.632,84.748 ccw(c85.212,84.903) 84.992,84.344 87.446,83.384 87.448,83.383 ccw(c87.665,83.943) 87.822,83.364 97.282,85.911 ; J4.1@84.282,41.562 84.53,40.906 87.039,34.996 87.314,34.699 ; 91.099,32.983 93.841,33.821 ; J6.1@93.101,37.03 93.06,36.546 93.841,33.821 ; 97.283,85.911 ccw(c97.126,86.49) 97.658,86.212 98.831,88.451 ; 97.334,95.78 98.885,88.861 cw(c98.299,88.729) 98.831,88.452 ; 97.334,95.781 cw(c97.919,95.911) 97.403,96.216 98.81,98.597 cw(c99.326,98.292) 99.167,98.87 U4.12@104.013,100.203 ; R15.2@106.209,40.643 106.417,40.601 107.466,40.749 ; C13.1@111.33,50.218 111.199,49.53 110.262,44.214 ; 19.329,64.186 20.487,66.501 20.644,66.658 20.761,66.704 28.996,69.943 28.998,69.944 ccw(c28.777,70.501) 29.112,70.004 30.355,70.842 30.404,70.941 C17.2@30.496,71.125 30.265,70.976 C17.2@30.448,70.931 ; C17.2@30.448,70.931 C17.2@30.83,70.837 ; C17.2@30.448,70.931 C17.2@30.83,70.837 ; C17.2@30.83,70.837 v1(31.496,69.85) 35.324,69.85 35.468,69.937 48.464,77.848 48.634,78.018 48.674,78.182 R9.2@49.036,79.671 49.386,79.89 50.701,80.503 R8.2@51.068,80.687 51.482,80.769 52.437,81.214 ccw(c52.184,81.758) 52.669,81.405 53.403,82.414 ; 31.096,43.288 46.162,27.749 ; 46.162,27.749 49.582,24.221 64.177,21.252 ; 49.231,57.11 cw(c49.628,56.66) 49.328,57.18 ; 49.231,57.11 cw(c49.628,56.66) 49.328,57.18 ; 49.231,57.11 cw(c49.628,56.66) 49.328,57.18 ; 49.231,57.11 cw(c49.628,56.66) 49.328,57.18 ; 53.403,82.414 ccw(c52.918,82.767) 53.511,82.856 ; 53.403,82.414 ccw(c52.918,82.767) 53.511,82.856 ; 53.403,82.414 ccw(c52.918,82.767) 53.511,82.856 ; 53.403,82.414 ccw(c52.918,82.767) 53.511,82.856 ; 64.177,21.252 ccw(c64.298,21.84) 64.579,21.309 ; 64.177,21.252 ccw(c64.298,21.84) 64.579,21.309 ; 64.177,21.252 ccw(c64.298,21.84) 64.579,21.309 ; 64.177,21.252 ccw(c64.298,21.84) 64.579,21.309 ; 64.515,70.221 cw(c65.113,70.167) 64.517,70.24 ; 64.515,70.221 cw(c65.113,70.167) 64.517,70.24 ; 64.515,70.221 cw(c65.113,70.167) 64.517,70.24 ; 64.515,70.221 cw(c65.113,70.167) 64.517,70.24 ; 65.686,80.691 cw(c65.166,80.392) 65.761,80.319 ; 65.686,80.691 cw(c65.166,80.392) 65.761,80.319 ; 65.686,80.691 cw(c65.166,80.392) 65.761,80.319 ; 65.686,80.691 cw(c65.166,80.392) 65.761,80.319 ; v1@68.839,25.137 ccw(c69.376,25.403) 69.222,24.823 ; v1@68.839,25.137 ccw(c69.376,25.403) 69.222,24.823 ; v1@68.839,25.137 ccw(c69.376,25.403) 69.222,24.823 ; v1@68.839,25.137 ccw(c69.376,25.403) 69.222,24.823 ; 93.841,33.821 95.368,34.287 95.386,34.292 101.445,35.933 101.501,35.946 107.925,37.037 108.345,37.33 109.12,38.688 109.195,39.06 109.195,39.061 108.796,42.197 ; 98.831,88.451 98.831,88.452 ; 107.466,40.749 ccw(c107.382,41.343) 107.857,40.977 ; 107.466,40.749 ccw(c107.382,41.343) 107.857,40.977 ; 107.466,40.749 ccw(c107.382,41.343) 107.857,40.977 ; 107.466,40.749 ccw(c107.382,41.343) 107.857,40.977 ; 107.858,40.977 108.796,42.197 ; 108.796,42.197 110.146,43.952 ; 110.146,43.952 ccw(c109.671,44.318) 110.262,44.214 ; 110.146,43.952 ccw(c109.671,44.318) 110.262,44.214 ; 110.146,43.952 ccw(c109.671,44.318) 110.262,44.214 ; 110.146,43.952 ccw(c109.671,44.318) 110.262,44.214
  Top Layer w1.2: D2.2@109.154,63.048 109.38,62.789 PS1.4@114.196,61.765 C16.2@113.42,57.845 111.793,50.543 C13.1@111.33,50.218
  Bottom Layer w0.5: v1(109.093,101.6) 110.617,100.076 v1(110.617,88.265)
  Bottom Layer w0.6: v1(31.115,78.613) 29.345,77.285 ; v1(31.496,69.85) 29.409,73.411 cw(c29.925,73.716) 29.327,73.671 29.327,73.673 29.106,76.764 ; C7.1@46.794,49.996 47.006,49.587 49.914,46.122 49.915,46.12 ; R1.2@64.73,50.879 64.474,50.501 63.13,49.415 ; B1.P@65.04,81.742 65.426,81.974 69.677,84.428 ; C14.2@65.757,25.588 66.149,25.75 68.127,26.589 U11.3@68.287,26.633 68.338,26.269 v1(68.707,25.4) ; U2.1@74.093,104.311 74.687,104.596 75.076,104.708 75.078,104.708 cw(c75.242,104.131) 75.526,104.659 76.747,104.002 ; U5.1@75.744,98.977 76.411,99.008 78.318,99.555 ; U6.1@77.395,93.516 78.028,93.665 79.987,94.227 ; 80.216,88.921 80.85,91.14 ; 29.106,76.764 cw(c29.705,76.805) 29.345,77.285 ; 29.106,76.764 cw(c29.705,76.805) 29.345,77.285 ; 29.106,76.764 cw(c29.705,76.805) 29.345,77.285 ; 29.106,76.764 cw(c29.705,76.805) 29.345,77.285 ; 49.915,46.12 ccw(c50.374,46.507) 50.223,45.927 ; 49.915,46.12 ccw(c50.374,46.507) 50.223,45.927 ; 49.915,46.12 ccw(c50.374,46.507) 50.223,45.927 ; 49.915,46.12 ccw(c50.374,46.507) 50.223,45.927 ; 50.223,45.927 55.248,44.641 55.25,44.641 ; 55.25,44.641 ccw(c55.397,45.222) 55.719,44.716 ; 55.25,44.641 ccw(c55.397,45.222) 55.719,44.716 ; 55.25,44.641 ccw(c55.397,45.222) 55.719,44.716 ; 55.25,44.641 ccw(c55.397,45.222) 55.719,44.716 ; 55.719,44.716 63.074,49.374 ; 63.074,49.374 ccw(c62.753,49.881) 63.13,49.415 ; 63.074,49.374 ccw(c62.753,49.881) 63.13,49.415 ; 63.074,49.374 ccw(c62.753,49.881) 63.13,49.415 ; 63.074,49.374 ccw(c62.753,49.881) 63.13,49.415 ; 69.677,84.428 cw(c69.977,83.909) 69.774,84.473 ; 69.677,84.428 cw(c69.977,83.909) 69.774,84.473 ; 69.677,84.428 cw(c69.977,83.909) 69.774,84.473 ; 69.677,84.428 cw(c69.977,83.909) 69.774,84.473 ; 69.774,84.473 78.531,87.618 U7.1@79.046,88.182 79.641,88.463 U7.1@79.804,88.509 ; 76.748,104.001 cw(c76.462,103.474) 77.035,103.653 ; 76.748,104.001 cw(c76.462,103.474) 77.035,103.653 ; 76.748,104.001 cw(c76.462,103.474) 77.035,103.653 ; 76.748,104.001 cw(c76.462,103.474) 77.035,103.653 ; 77.035,103.653 78.318,99.555 ; 78.318,99.555 79.987,94.227 ; U7.1@79.804,88.509 ccw(c79.639,89.086) 80.215,88.92 ; U7.1@79.804,88.509 ccw(c79.639,89.086) 80.215,88.92 ; U7.1@79.804,88.509 ccw(c79.639,89.086) 80.215,88.92 ; U7.1@79.804,88.509 ccw(c79.639,89.086) 80.215,88.92 ; 79.987,94.227 80.845,91.484 80.846,91.483 ; 80.846,91.483 cw(c80.273,91.305) 80.85,91.14 ; 80.846,91.483 cw(c80.273,91.305) 80.85,91.14 ; 80.846,91.483 cw(c80.273,91.305) 80.85,91.14 ; 80.846,91.483 cw(c80.273,91.305) 80.85,91.14
XTAL1: C2.2 U1.7 XTAL1.2 | length 22.3
  Top Layer w0.4: 52.774,73.897 53.095,73.649 54.884,70.552 61.02,70.552 61.174,70.398 cw(c60.892,70.115) 61.241,70.309 63.034,67.083 ; U1.7@61.531,64.866 U1.7@61.945,65.213 ; U1.7@61.945,65.213 62.631,65.704 ; U1.7@61.945,65.213 62.631,65.704 ; U1.7@61.945,65.213 62.631,65.704 ; 62.631,65.704 ccw(c62.397,66.029) 62.777,65.902 ; 62.631,65.704 ccw(c62.397,66.029) 62.777,65.902 ; 62.631,65.704 ccw(c62.397,66.029) 62.777,65.902 ; 62.631,65.704 ccw(c62.397,66.029) 62.777,65.902 ; 62.777,65.903 63.063,66.762 ; 62.777,65.903 63.063,66.762 ; 62.777,65.903 63.063,66.762 ; 63.034,67.081 cw(c62.684,66.889) 63.063,66.762 ; 63.034,67.081 cw(c62.684,66.889) 63.063,66.762 ; 63.034,67.081 cw(c62.684,66.889) 63.063,66.762 ; 63.034,67.081 cw(c62.684,66.889) 63.063,66.762 ; 63.034,67.081 63.034,67.083 ; 63.034,67.081 63.034,67.083 ; 63.034,67.081 63.034,67.083
XTAL2: C3.2 U1.8 XTAL1.1 | length 17.3
  Top Layer w0.4: 48.456,71.738 48.725,71.46 XTAL1.1@50.342,68.658 ; XTAL1.1@50.277,68.62 58.814,68.808 58.881,68.808 59.237,68.694 59.338,68.594 61.117,65.747 61.117,65.639 60.614,65.324 U1.8@61.108,65.544
pads on no net: J2.8 J4.6 U1.19 U1.20 U1.22 U3.13 U4.5 U4.7 U4.8 U4.9 U4.10 U4.13 U4.14 U8.3 U8.5 U11.4 U12.13

## Polygon pours and split planes (outlines as drawn)
GND on Bottom Layer "GND_L02_P020" (solid, pour order 20): -1.524,69.977 54.991,106.553 83.185,114.554 122.174,118.11 113.538,76.2 118.237,68.707 133.35,65.913 135.763,61.468 131.191,33.02 53.721,6.604
NetC19_1 on Bottom Layer "NETC19_1_L02_P008" (solid, pour order 8): 182.245,35.052 183.261,36.068 183.261,43.251 191.891,54.145 192.062,56.199 189.992,58.039 188.341,57.658 181.102,48.133 180.975,45.593 180.84,38.706 179.832,37.068 179.832,36.068 180.975,35.052
NetC20_1 on Bottom Layer "NETC20_1_L02_P007" (solid, pour order 7): 143.51,52.578 142.748,51.816 141.708,46.207 143.498,40.264 160.925,33.293 166.599,34.429 180.591,54.226 184.92,59.944 195.417,58.552 207.645,74.669 207.645,77.724 205.74,79.629 204.089,79.629 200.977,75.882 191.193,64.2 181.894,62.044 163.955,37.565 161.021,36.972 147.704,41.991 145.62,44.996 146.448,51.459 145.415,52.578
NetC20_2 on Bottom Layer "NETC20_2_L02_P005" (solid, pour order 5): 201.993,91.186 223.52,74.803 223.52,71.628 219.755,65.926 208.407,51.562 208.407,44.069 209.677,42.799 209.677,40.386 209.042,39.751 207.01,39.751 204.851,41.91 204.851,49.784 203.708,50.927 203.708,53.653 216.742,71.258 216.141,73.533 199.291,86.135 198.056,87.678 199.093,90.423 200.467,91.186
NetC19_2 on Bottom Layer "NETC19_2_L02_P002" (solid, pour order 2): 202.542,48.491 203.581,47.625 203.581,46.736 198.12,38.862 194.691,40.894 200.068,48.787 201.288,48.961
NetC19_1 on Bottom Layer "NETC19_1_L02_P000" (solid, pour order 0): 182.245,35.052 183.261,36.068 183.261,43.311 191.897,54.212 192.062,56.199 189.992,58.039 188.341,57.658 181.102,48.133 180.975,45.593 180.84,38.706 179.832,37.068 179.832,36.068 180.975,35.052
Fan_Control on Bottom Layer "FAN_CONTROL_L02_P014" (solid, pour order 14): 171.037,71.893 161.036,75.184 157.804,74.103 155.727,72.285 155.448,70.612 155.956,69.723 157.353,69.469 158.496,69.85 159.133,72.079 160.401,72.898 170.486,69.724 171.254,69.878 171.636,70.895
NetC10_2 on Bottom Layer "NETC10_2_L02_P012" (solid, pour order 12): 183.014,97.653 173.444,72.644 171.831,72.136 156.603,77.736 156.272,79.088 157.26,80.645 159.512,80.645 167.861,76.902 169.957,77.816 178.471,98.578 180.085,99.599 182.276,98.759
NetC19_2 on Bottom Layer "NETC19_2_L02_P001" (solid, pour order 1): 184.086,32.575 184.928,31.974 186.376,32.155 190.395,36.823 190.738,36.972 195.494,37.991 202.14,33.101 202.946,33.02 204.314,34.692 204.39,35.304 197.358,40.513 194.182,41.118 188.397,39.53 183.967,34.13
GND on Top Layer "GND_L01_P018" (solid, pour order 18): -1.651,69.596 54.864,106.172 83.058,114.173 122.047,117.729 113.411,75.819 118.11,68.326 133.223,65.532 135.636,61.087 131.064,32.639 53.594,6.223
Fan_Control on Top Layer "FAN_CONTROL_L01_P017" (solid, pour order 17): 143.268,59.821 148.566,59.014 153.797,63.373 156.035,71.627 156.833,72.358 158.75,72.009 159.004,71.374 156.833,62.738 149.733,56.388 144.907,57.15 142.875,57.531
FAN_OUTPUT on Top Layer "FAN_OUTPUT_L01_P016" (solid, pour order 16): 142.649,59.923 140.585,60.31 139.726,55.563 138.43,53.467 137.941,51.14 138.121,50.673 140.589,50.292 140.803,50.506

## Keep-outs
Keep-Out Layer:
  circle w0.254: c55.499,18.288 r2.8
  circle w0.254: c7.493,67.564 r2.8
  circle w0.254: c109.937,75.765 r2.8
  region: 6.731,70.231 8.255,70.231 cw(c8.255,69.723) 8.763,69.723 8.89,69.723 cw(c8.89,68.961) 9.652,68.961 cw(c9.652,68.453) 10.16,68.453 10.16,66.548 cw(c9.906,66.548) 9.906,66.294 cw(c8.89,66.294) 8.89,65.278 8.763,65.278 cw(c8.255,65.278) 8.255,64.77 6.731,64.77 cw(c6.731,65.024) 6.477,65.024 cw(c6.477,66.548) 4.953,66.548 4.953,68.834 cw(c5.842,68.834) 5.842,69.723
  region: 54.61,20.955 56.007,20.955 ccw(c56.134,20.955) 56.134,20.828 56.642,20.828 cw(c56.642,20.574) 56.896,20.574 57.023,20.574 cw(c57.023,19.939) 57.658,19.939 cw(c57.658,19.558) 58.039,19.558 58.039,17.526 cw(c57.912,17.526) 57.912,17.399 57.912,16.891 cw(c57.15,16.891) 57.15,16.129 cw(c56.642,16.129) 56.642,15.621 54.483,15.621 cw(c54.483,15.875) 54.229,15.875 54.102,15.875 cw(c54.102,16.383) 53.594,16.383 cw(c53.594,16.891) 53.086,16.891 53.086,17.272 cw(c53.086,17.526) 52.832,17.526 52.832,19.05 cw(c53.086,19.05) 53.086,19.304 53.086,19.558 cw(c53.34,19.558) 53.34,19.812 53.34,19.939 cw(c53.975,19.939) 53.975,20.574
  region: 109.474,78.486 109.474,75.819 ccw(c111.506,75.819) 111.506,73.787 ccw(c111.506,74.803) 112.522,74.803 112.522,76.708 ccw(c111.887,76.708) 111.887,77.343 ccw(c110.998,77.343) 110.998,78.232 110.871,78.232 ccw(c110.744,78.232) 110.744,78.359 108.839,78.359 ccw(c108.839,77.597) 108.077,77.597 ccw(c108.077,76.835) 107.315,76.835 107.315,74.676 ccw(c107.569,74.676) 107.569,74.422 ccw(c108.585,74.422) 108.585,73.406 108.712,73.406 ccw(c109.093,73.406) 109.093,73.025 110.871,73.025 ccw(c110.871,73.533) 111.379,73.533 ccw(c111.379,73.787) 111.633,73.787

## Silkscreen, mask and mechanical layers (free items; w line width, h text height)
Top Overlay:
  text "SPK" at 111.666,112.654 h3 r279.46
  text "LCD" at 15.344,59.079 h3 r43.26
  text "FAN" at 153.035,51.562 h3 r260.22
  text "L" at 137.795,44.196 h3 r350.22
  text "N" at 142.494,43.307 h3 r350.22
  text "LED" at 99.822,42.418 h3 r285.26
  text "S" at 146.889,42.253 h3 r350.22
  text "TXD" at 67.274,41.209 h1.52 r20
  text "KEYPAD" at 32.258,39.37 h3 r45
  text "RXD" at 68.417,38.161 h1.52 r20
  text "+" at 88.508,36.501 h3 r285.86
  text "SENSOR" at 68.611,36.208 h3 r293.2
  text "AC INPUT" at 190.908,35.541 h3 r234.33
  text "S" at 171.632,33.199 h3 r325
  text "N" at 176.403,30.226 h3 r325
  text "L" at 180.213,27.559 h3 r325
Mechanical 9:
  drawing of 153 lines, arcs and shapes, not listed

## Text inside footprints (layer, text, board x,y; h text height)
B1: Top Overlay "-" at 67.855,79.152 h1.27 r300; Top Overlay "+" at 65.823,82.671 h1.27 r300